# EAGLE board sterowanie_przekaźnik (EAGLE 8.0.0)
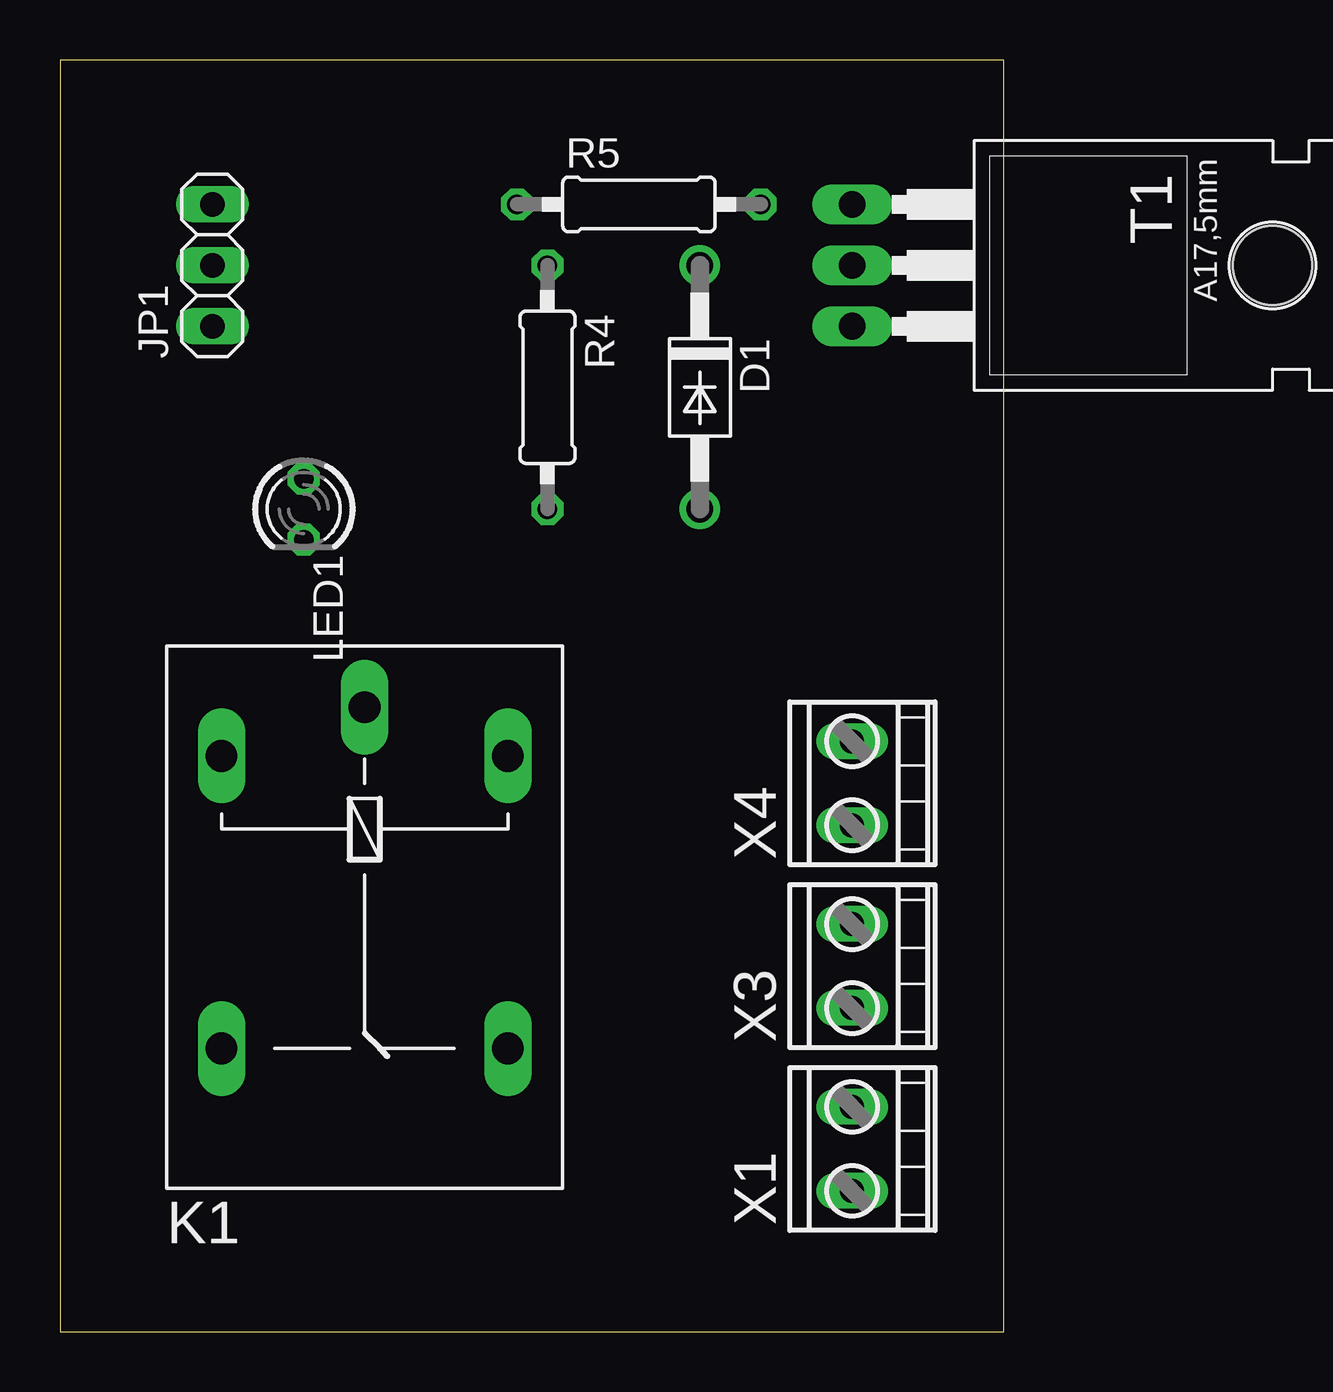
[diagram p0: board, top side]
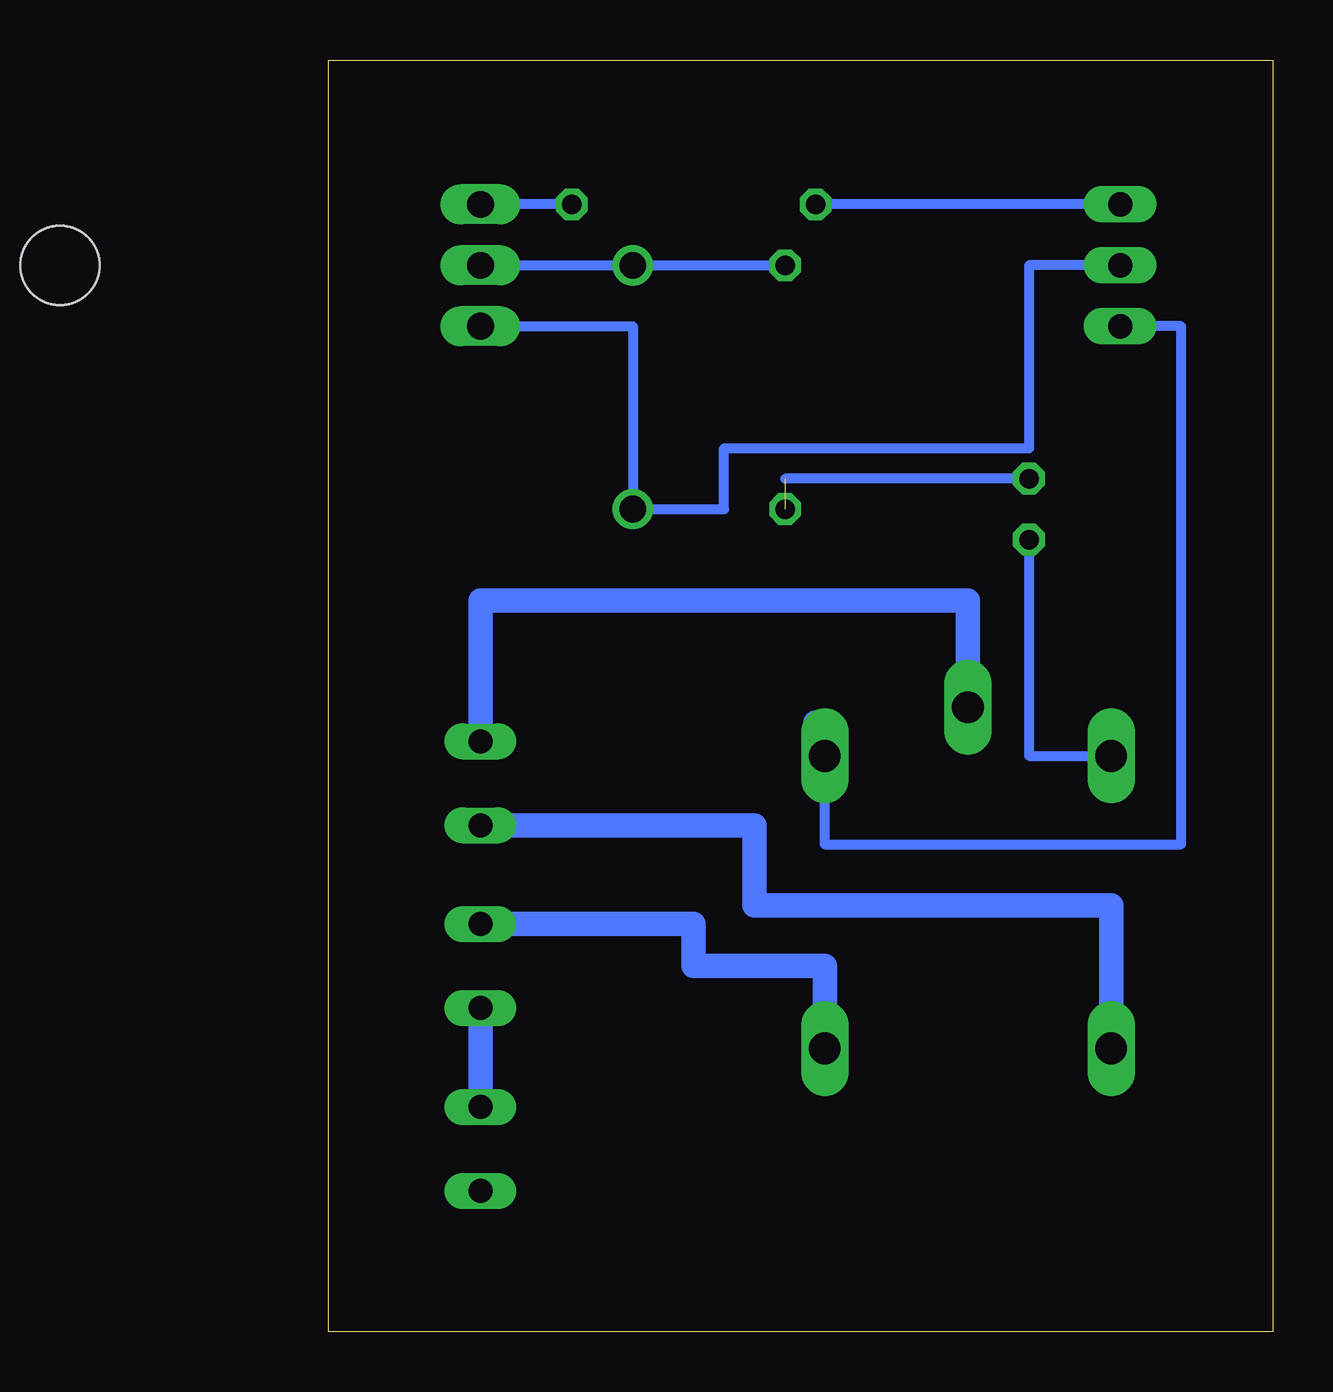
[diagram p1: board, bottom side, seen from below]

Size 39.35 x 53.01 mm. Coordinates in mm from the lower left corner, seen from the top.
Outline: 0,0 39.35,0 39.35,53.01 0,53.01 0,0
Copper layers (1*16): Top 0.035mm / dielectric 1.5mm / Bottom 0.035mm
Design rules "default": minimum track width 10mil, minimum drill 24mil, track to track 8mil, track to pad 8mil, pad to pad 8mil, via to via 8mil, smd to smd 8mil, copper to edge 40mil, drill to drill 8mil, minimum pad ring 10mil, minimum via ring 8mil, stop-mask expansion 4mil, vias tented up to drill 0mil, thermal gap 10mil

## Footprints (pad centres in the part's own frame; a part is rotated, then mirrored left to right if it is on the bottom)
DO41-10 = drill 1.118: A 5.08,0; C -5.08,0
1X03 = drill 1.016 long: 1 -2.54,0; 2 0,0; 3 2.54,0
G5LE = drill 1.321 long: 1 -7.493,-5.969; 2 -7.493,5.969; O 4.699,5.969; P -9.525,0; S 4.699,-5.969
LED3MM = drill 0.813 octagon: A -1.27,0; K 1.27,0
0207/10 = drill 0.813 octagon: 1 -5.08,0; 2 5.08,0
TO220 = drill 1.118 long: 1 -2.54,-6.35; 2 0,-6.35; 3 2.54,-6.35 | hole 3.302: 0,11.176
AK550/2 = drill 1 pad 1.5 long: 1 -1.75,0; 2 1.75,0

## Placement (x,y rotation side)
D1  1N4004  [DO41-10]  26.67,39.37 270 top
JP1  [1X03]  6.35,44.45 90 top
K1  G5L  [G5LE]  12.7,16.51 270 top
LED1  TLLR4400  [LED3MM]  10.16,34.29 270 top
R4  [0207/10]  20.32,39.37 270 top
R5  [0207/10]  24.13,46.99 0 top
T1  2N6101  [TO220]  39.37,44.45 270 top
X1  AK550/2  [AK550/2]  33.02,7.62 90 top
X3  AK550/2  [AK550/2]  33.02,15.24 90 top
X4  AK550/2  [AK550/2]  33.02,22.86 90 top

## Library data of the parts
D1 = diode
JP1 = pinhead
K1 = relay; OC_FARNELL: unknown; OC_NEWARK: unknown
LED1 = led; MF: VISHAY SEMICONDUCTOR; OC_FARNELL: 1612437
R4 R5 = eagle-ltspice; SPICEMODEL: NONE; SPICEPREFIX: R
T1 = transistor
X1 X3 X4 = con-ptr500; OC_FARNELL: unknown; OC_NEWARK: unknown

## Nets
N$1: K1.P X4.2
N$2: K1.S X4.1
N$3: X1.2 X3.1
N$4: K1.1 LED1.K
N$5: JP1.3 R5.1
N$6: D1.C R4.1 T1.2
N$7: D1.A JP1.2 T1.3
N$8: K1.O X3.2
N$9: JP1.1 K1.2
N$10: R5.2 T1.1
N$11: LED1.A R4.2

## Tracks (layer width: path | path; a pad name or v marks a point on that pad's centre or on a via)
N$1
  Bottom 1.016: K1.P 12.7,30.48 33.02,30.48 X4.2
N$2
  Bottom 1.016: K1.S 6.73,17.78 21.59,17.78 21.59,21.11 X4.1
N$3
  Bottom 1.016: X3.1 X1.2
N$4
  Bottom 0.406: LED1.K 10.16,24 K1.1
N$5
  Bottom 0.406: JP1.3 R5.1
N$6
  Bottom 0.406: T1.2 D1.C R4.1
N$7
  Bottom 0.406: T1.3 26.67,41.91 D1.A 22.86,34.29 22.86,36.83 10.16,36.83 10.16,44.45 JP1.2
N$8
  Bottom 1.016: K1.O 18.67,15.24 24.13,15.24 24.13,16.99 X3.2
N$9
  Bottom 0.406: K1.2 18.67,20.32 3.81,20.32 3.81,41.91 JP1.1
  Bottom 1.016: K1.2 18.67,25.4 19.05,25.4
N$10
  Bottom 0.406: R5.2 T1.1
N$11  (1 unrouted)
  Bottom 0.406: LED1.A 20.32,35.56